# Altium PCB W5500-2_V1.PcbDoc
Units mm, origin at the board's own origin, x right, y up, seen from the top; angles counter-clockwise.
Board outline 100 x 38 mm, 2 copper layers (Top Layer, Bottom Layer), stack 1.536 mm thick; 76 components, 52 nets, 291 pads, 233 vias.
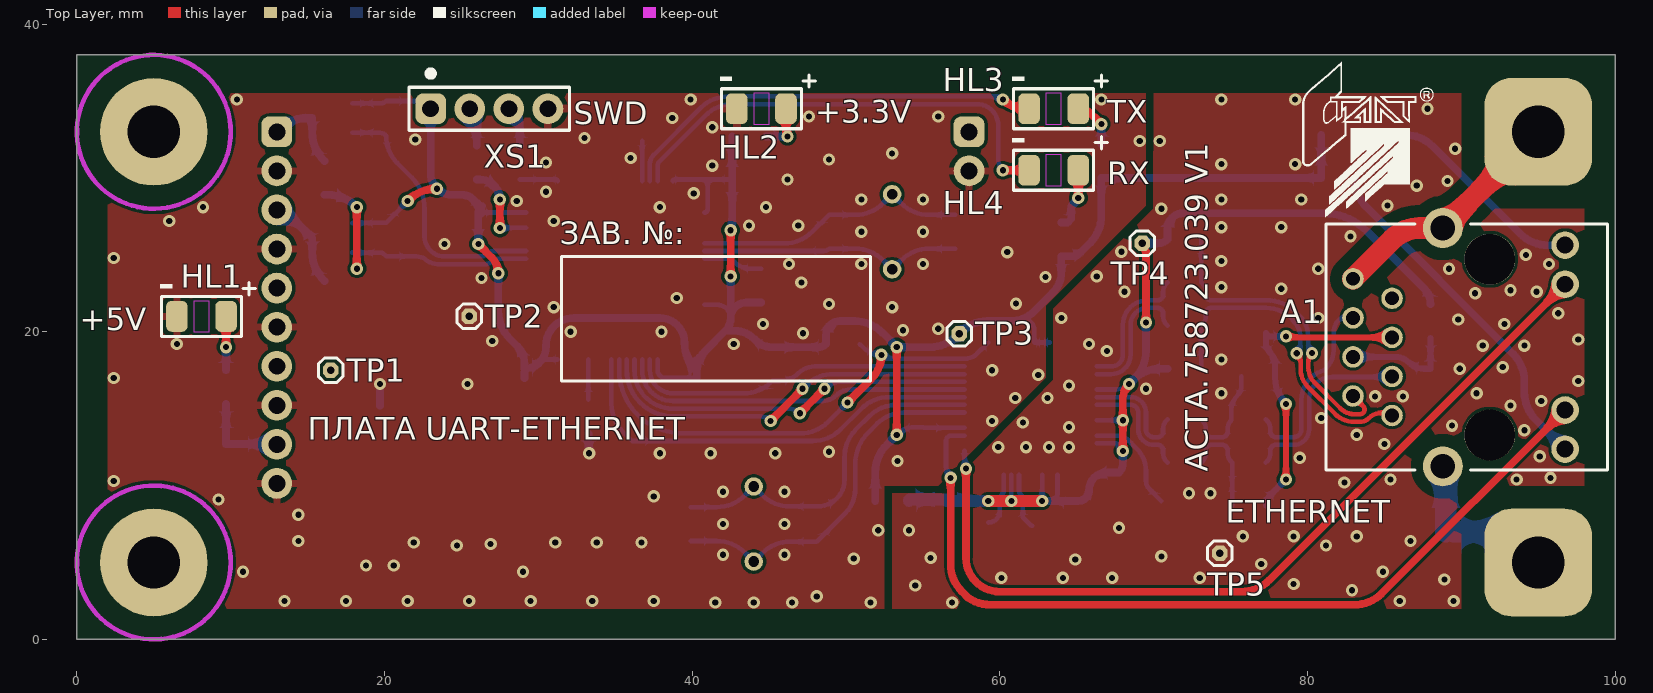
[diagram p0: Top Layer view]
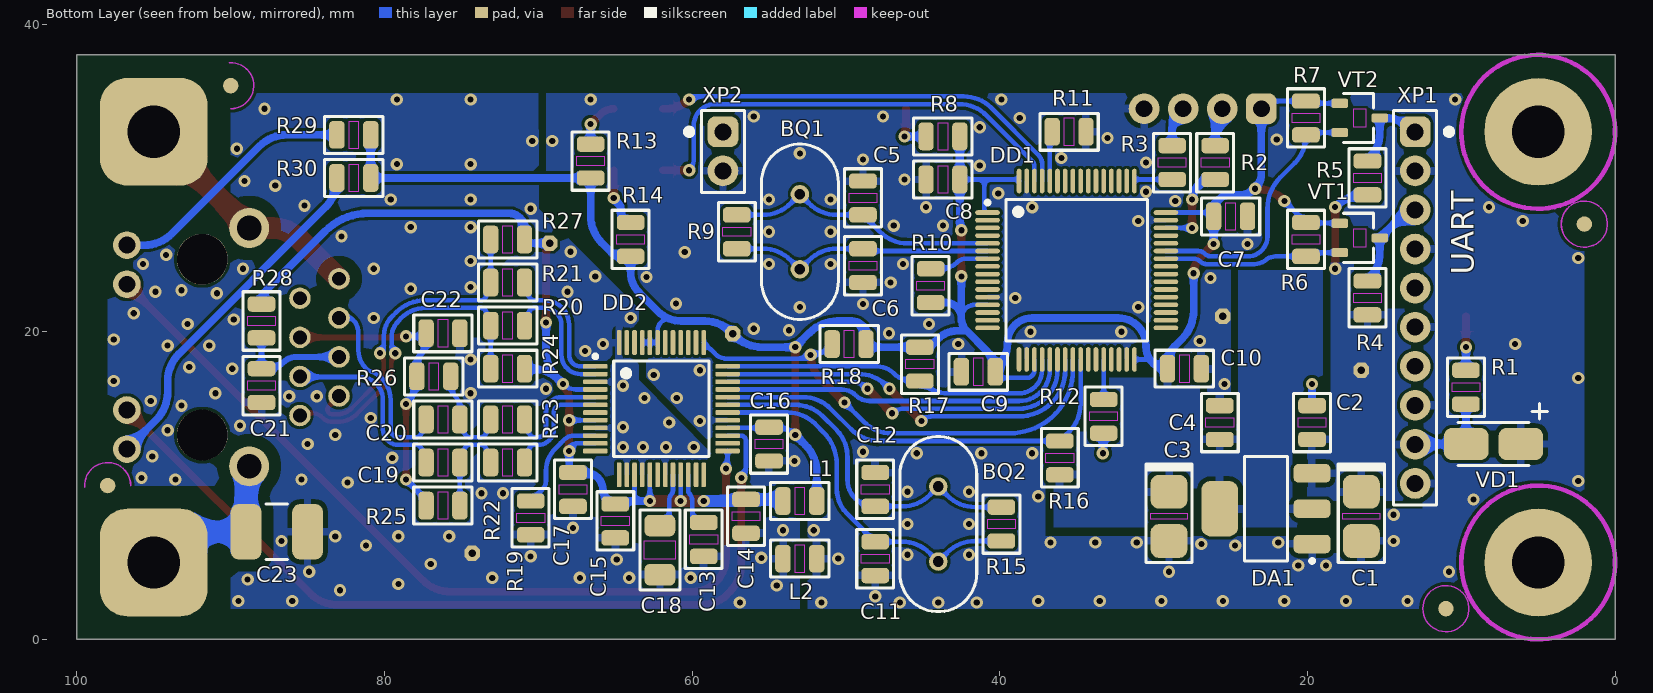
[diagram p1: Bottom Layer view, seen from below]

## Layer stack, top to bottom
Top Solder: solder mask 0.01, Solder Resist, Dk 3.5
Top Layer: signal copper 0.018
Dielectric 1: core 1.5, FR4 Tg135, Dk 4.5
Bottom Layer: signal copper 0.018
Bottom Solder: solder mask 0.01, Solder Resist, Dk 3.5

## Board outline
0,0 0,38 100,38 100,0

## Design rules (kind name [scope] priority, off if disabled: settings)
Clearance Clearance_1 [InNet('EARTH')] p1: gap=0.8 ignorepadtopadclearanceinfootprint=FALSE except(0.7: Arc-THPad Arc-Hole Track-THPad Track-Hole SMDPad-THPad SMDPad-Hole THPad-THPad THPad-Hole Via-Hole Fill-Hole Poly-Hole Region-Hole Text-Hole)
Clearance [All] p2: gap=0.2 ignorepadtopadclearanceinfootprint=FALSE
ComponentClearance [All] p1: gap=0.1 collisioncheckmode=3 verticalgap=0.1 showdistances=FALSE
DiffPairsRouting [All] p1: maxlimit=1 minlimit=0.2 mostfreqgap=0.2 toplayer_minwidth=0.2 toplayer_maxwidth=1 toplayer_prefwidth=0.2 bottomlayer_minwidth=0.2 bottomlayer_maxwidth=1 bottomlayer_prefwidth=0.2 maxuncoupledlength=12.7
Height [All] p1: minheight=0 maxheight=50 prefheight=15
HoleSize [All] p1: absolutevalues=TRUE maxlimit=3.4 minlimit=0.4 maxpercent=80.000 minpercent=20.000
HoleToHoleClearance [All] p1: gap=0.3 allowstackedmicrovias=TRUE
MinimumSolderMaskSliver [All] p1: minsoldermaskwidth=0.1
PasteMaskExpansion [All] p1: expansion=0.05
PlaneConnect [All] p1: planeconnectstyle=Relief reliefexpansion=0.3 reliefentries=4 reliefconductorwidth=0.3 reliefairgap=0.2
PolygonConnect PolygonConnect_testpoint [InComponent('TP1') OR InComponent('TP2') OR InComponent('TP3') OR InComponent('TP4') OR InComponent('TP5')] p1: connectstyle=Direct reliefconductorwidth=0.254 reliefentries=4 polygonreliefangle="90 Angle" airgapwidth=0.254
PolygonConnect PolygonConnect_via [isVia] p2: connectstyle=Direct reliefconductorwidth=0.254 reliefentries=4 polygonreliefangle="90 Angle" airgapwidth=0.254
PolygonConnect [All] p3: connectstyle=Relief reliefconductorwidth=0.5 reliefentries=4 polygonreliefangle="90 Angle" airgapwidth=0.3
RoutingCorners [All] p1: cornerstyle=Round minsetback=0.5 maxsetback=2.5
RoutingVias [All] p1: holewidth=0.4 width=0.8 viastyle="Through Hole" minholewidth=0.4 minwidth=0.8 maxholewidth=0.5 maxwidth=1
SilkToSilkClearance [All] p1: silktosilkclearance=0.1
SilkToSolderMaskClearance [IsPad] p1: minsilkscreentomaskgap=0.1 clearancetoexposedcopper=TRUE
SolderMaskExpansion SolderMaskExpansion_via [isVia] p1: expansion=-0.6 istentingtop=FALSE
SolderMaskExpansion [All] p2: expansion=0.1 istentingtop=FALSE
Width [All] p1: maxlimit=5 minlimit=0.2 preferedwidth=0.5
19 further rules are at their usual default settings.

## Classes and differential pairs
net class ETHERNET: RD_N RD_P RDI_N RDI_P RX_N RX_P TD_N TD_P TX_N TX_P
differential pair RD: +RD_P -RD_N
differential pair TX: +TX_P -TX_N
differential pair TD: +TD_P -TD_N
differential pair RX: +RX_P -RX_N
differential pair RDI: +RDI_P -RDI_N

## Components (designator, comment, footprint, x,y, rotation, side; value= is the part's Value field where it differs from the comment)
A1 "HR911105A" HR911105A 85.5,19 r180 top locked
BQ1 "HT-49S_Rated" HT-49S 53,26.5 r270 bottom value=12MHz
BQ2 "HT-49S_Rated" HT-49S 44,7.5 r90 bottom value=25MHz
C1 "CaseB_TantalumCap" CaseB_TantalumCap 16.5,8 r270 bottom value=47uF
C2 "CAP0805_Rated" CAP0805 19.7,14.1 r90 bottom value=1uF
C3 "CaseB_TantalumCap" CaseB_TantalumCap 29,8 r270 bottom value=47uF
C4 "CAP0805_Rated" CAP0805 25.7,14.1 r90 bottom value=1uF
C5 "CAP0805_Rated" CAP0805 48.9,28.7 r270 bottom value=18pF
C6 "CAP0805_Rated" CAP0805 48.9,24.3 r90 bottom value=18pF
C7 "CAP0805_Rated" CAP0805 25,27.5 r180 bottom value=0.1uF
C8 "CAP0805_Rated" CAP0805 43.7,29.9 r0 bottom value=0.1uF
C9 "CAP0805_Rated" CAP0805 41.4,17.4 r0 bottom value=0.1uF
C10 "CAP0805_Rated" CAP0805 28,17.6 r180 bottom value=0.1uF
C11 "CAP0805_Rated" CAP0805 48.1,5.25 r90 bottom value=18pF
C12 "CAP0805_Rated" CAP0805 48.1,9.75 r270 bottom value=18pF
C13 "CAP0805_Rated" CAP0805 59.25,6.5 r270 bottom value=0.01uF
C14 "CAP0805_Rated" CAP0805 56.5,8 r270 bottom value=0.1uF
C15 "CAP0805_Rated" CAP0805 65,7.7 r270 bottom value=0.1uF
C16 "CAP0805_Rated" CAP0805 55,12.7 r270 bottom value=0.1uF
C17 "CAP0805_Rated" CAP0805 67.75,9.75 r270 bottom value=0.1uF
C18 "CAP1206_Rated" CAP1206 62.1,5.8 r270 bottom value=4.7uF
C19 "CAP0805_Rated" CAP0805 76.2,11.5 r0 bottom value=6800pF
C20 "CAP0805_Rated" CAP0805 76.2,14.3 r0 bottom value=6800pF
C21 "CAP0805_Rated" CAP0805 88,16.5 r270 bottom value=0.022uF
C22 "CAP0805_Rated" CAP0805 76.2,19.9 r180 bottom value=0.01uF
C23 "CAP1812_Rated" CAP1812 87,7 r0 bottom value=2200pF
DA1 "AMS1117-3.3" SOT-223 22.7,8.5 r0 bottom
DD1 "STM32F103RB" LQFP-64 35,24 r180 bottom
DD2 "W5500" LQFP-48 62,15 r180 bottom
HL1 "KPTD-3216MGC" "KPTD-3216 Green" 8.1,21 r0 top
HL2 "KPTD-3216MGC" "KPTD-3216 Green" 44.5,34.5 r0 top
HL3 "KPTD-3216MGC" "KPTD-3216 Green" 63.5,34.5 r0 top
HL4 "KPTD-3216SYC" "KPTD-3216 Yellow" 63.5,30.5 r0 top
L1 "BLM21BD121SN1D" IND0805 53,9 r0 bottom value="120 Ohm"
L2 "BLM21BD121SN1D" IND0805 53,5.25 r0 bottom value="120 Ohm"
R1 "RES0805_Rated" RES0805 9.7,16.4 r270 bottom value=3k
R2 "RES0805_Rated" RES0805 26,31 r270 bottom value=33
R3 "RES0805_Rated" RES0805 28.8,31 r270 bottom value=33
R4 "RES0805_Rated" RES0805 16.1,22.2 r270 bottom value=10k
R5 "RES0805_Rated" RES0805 16.1,30 r270 bottom value=10k
R6 "RES0805_Rated" RES0805 20.1,26 r90 bottom value=10k
R7 "RES0805_Rated" RES0805 20.1,33.9 r90 bottom value=10k
R8 "RES0805_Rated" RES0805 43.7,32.7 r180 bottom value=1k
R9 "RES0805_Rated" RES0805 57.1,26.5 r90 bottom value=1M
R10 "RES0805_Rated" RES0805 44.5,23 r90 bottom value=10k
R11 "RES0805_Rated" RES0805 35.5,33 r0 bottom value=10k
R12 "RES0805_Rated" RES0805 33.25,14.5 r90 bottom value=10k
R13 "RES0805_Rated" RES0805 66.6,31.1 r270 bottom value=1k
R14 "RES0805_Rated" RES0805 64,26 r270 bottom value=1k
R15 "RES0805_Rated" RES0805 39.9,7.5 r270 bottom value=1M
R16 "RES0805_Rated" RES0805 36.1,11.8 r270 bottom value=10k
R17 "RES0805_Rated" RES0805 45.2,17.9 r90 bottom value=10k
R18 "RES0805_Rated" RES0805 49.8,19.2 r180 bottom value=10k
R19 "RES0805_Rated" RES0805 70.5,7.9 r90 bottom value="12.4k 1%"
R20 "RES0805_Rated" RES0805 72,20.4 r0 bottom value=33
R21 "RES0805_Rated" RES0805 72,23.2 r0 bottom value=33
R22 "RES0805_Rated" RES0805 72,11.5 r0 bottom value=33
R23 "RES0805_Rated" RES0805 72,14.3 r0 bottom value=33
R24 "RES0805_Rated" RES0805 72,17.6 r180 bottom value="49.9 1%"
R25 "RES0805_Rated" RES0805 76.2,8.7 r180 bottom value="49.9 1%"
R26 "RES0805_Rated" RES0805 76.8,17.1 r0 bottom value="49.9 1%"
R27 "RES0805_Rated" RES0805 72,26 r180 bottom value="49.9 1%"
R28 "RES0805_Rated" RES0805 88,20.7 r90 bottom value="10 1%"
R29 "RES0805_Rated" RES0805 82,32.8 r180 bottom value=1k
R30 "RES0805_Rated" RES0805 82,30 r180 bottom value=1k
TP1 "TestPad" PAD-TH-OCT1x1-0.5 16.5,17.5 r0 top
TP2 "TestPad" PAD-TH-OCT1x1-0.5 25.5,21 r90 top
TP3 "TestPad" PAD-TH-OCT1x1-0.5 57.372,19.872 r90 top
TP4 "TestPad" PAD-TH-OCT1x1-0.5 69.268,25.756 r90 top
TP5 "TestPad" PAD-TH-OCT1x1-0.5 74.3,5.6 r90 top
VD1 "SMAJ5.0A" "SMA (DO-214AC)" 7.9,12.7 r180 bottom
VT1 "BSS138" SOT-23 16.6,26.1 r180 bottom
VT2 "BSS138" SOT-23 16.6,33.9 r180 bottom
XP1 "PLS-10" PLS-10 13,33 r270 bottom
XP2 "PLS-2" PLS-2 58,33 r270 bottom
XS1 "PBS-4" PBS-4 23,34.5 r0 top

## Footprints (in the part's own frame and the unit in brackets; to place one, negate y for a bottom-side part, rotate by r counter-clockwise, add the part's x,y. Pads: shape width x height; smd on the part's side, far side on the other; paste and mask are expansions set on the pad)
CAP0805 [mm] "Chip Capacitor, 2-Leads, Body 2,00x1,25mm, IPC Low Density"
  rrect50% 1x1.8 smd: 1(-1.1,0) 2(1.1,0)
  Top Layer keep-out region: -0.3,0.9 0.3,0.9 0.3,-0.9 -0.3,-0.9
  silkscreen extent -1.9,-1.2 1.9,1.2, body extent -1,-0.62 1,0.63, height 1
CAP1206 [mm] "Chip Capacitor, 2-Leads"
  rrect50% 1.4x2 smd: 1(-1.6,0) 2(1.6,0)
  Top Layer keep-out region: -0.6,1 0.6,1 0.6,-1 -0.6,-1
  silkscreen extent -2.6,-1.3 2.6,1.3, body extent -1.7,-0.9 1.7,0.9, height 1
CAP1812 [mm] "Chip Capacitor, 2-Leads"
  rrect50% 2x3.6 smd: 1(-2,0) 2(2,0)
  silkscreen extent -0.7,-1.8 0.7,1.8, body extent -2.25,-1.6 2.25,1.6, height 1
CaseB_TantalumCap [mm]
  rrect50% 2.2x2.4 smd: 1(-1.6,0) 2(1.6,0)
  Top Layer keep-out region: -0.2,1.2 0.2,1.2 0.2,-1.2 -0.2,-1.2
  silkscreen extent -3.4,-1.5 3,1.5, body extent -1.75,-1.4 1.75,1.4, height 1.9
HR911105A [mm] "Ethernet Connector 10/100 1x1 Tab Down RJ45 w/mag G/Y LED"
  round 3.3 hole 3.3: 0(-6.35,5.715) 0(-6.35,-5.715)
  round 2.6 hole 1.6: 0(-3.3,7.745) 0(-3.3,-7.745)
  round 1.4 hole 0.9: 1(0,4.445) 2(2.54,3.175) 3(0,1.905) 4(2.54,0.635) 5(0,-0.635) 6(2.54,-1.905) 7(0,-3.175) 8(2.54,-4.445)
  round 1.8 hole 1.1: 9(-11.25,6.63) 10(-11.25,4.09) 11(-11.25,-4.09) 12(-11.25,-6.63)
  silkscreen extent -14,-8 4.3,8, body extent -17.27,-7.94 4.13,7.94, height 13.7
HT-49S [mm] "TH Crystal"
  round 1.2 hole 0.7: 1(-2.44,0) 2(2.44,0)
  silkscreen extent -5.7,-2.5 5.7,2.5, body extent -5.48,-2.25 5.5,2.25, height 3.7
IND0805 [mm] "Chip Inductor, 2-Leads, Body 2,00x1,25mm, IPC Low Density"
  rrect50% 1x1.8 smd: 1(-1.1,0) 2(1.1,0)
  Top Layer keep-out region: -0.3,0.9 0.3,0.9 0.3,-0.9 -0.3,-0.9
  silkscreen extent -1.9,-1.2 1.9,1.2, body extent -1,-0.62 1,0.63, height 0.85
"KPTD-3216 Green" [mm] "3.2x1.6mm SMD LED Green"
  rrect50% 1.4x2 smd: A(1.6,0) K(-1.6,0)
  Top Layer keep-out region: -0.5,-1 0.5,-1 0.5,1 -0.5,1
  silkscreen extent -2.7,-1.3 3.5,2.2, body extent -1.6,-0.8 1.6,0.8, height 1.8
"KPTD-3216 Yellow" [mm] "3.2x1.6mm SMD LED Yellow"
  rrect50% 1.4x2 smd: A(1.6,0) K(-1.6,0)
  Top Layer keep-out region: -0.5,-1 0.5,-1 0.5,1 -0.5,1
  silkscreen extent -2.7,-1.3 3.5,2.2, body extent -1.6,-0.8 1.6,0.8, height 1.8
LQFP-48 [mm] "LQFP, 48-Leads, Body 7,00x7,00mm, Pitch 0,50mm, IPC Low Density"
  rrect50% 1.6x0.3 smd: 1(-4.3,2.75) 2(-4.3,2.25) 3(-4.3,1.75) 4(-4.3,1.25) 5(-4.3,0.75) 6(-4.3,0.25) 7(-4.3,-0.25) 8(-4.3,-0.75) 9(-4.3,-1.25) 10(-4.3,-1.75) 11(-4.3,-2.25) 12(-4.3,-2.75) 25(4.3,-2.75) 26(4.3,-2.25) 27(4.3,-1.75) 28(4.3,-1.25) 29(4.3,-0.75) 30(4.3,-0.25) 31(4.3,0.25) 32(4.3,0.75) 33(4.3,1.25) 34(4.3,1.75) 35(4.3,2.25) 36(4.3,2.75)
  rrect50% 0.3x1.6 smd: 13(-2.75,-4.3) 14(-2.25,-4.3) 15(-1.75,-4.3) 16(-1.25,-4.3) 17(-0.75,-4.3) 18(-0.25,-4.3) 19(0.25,-4.3) 20(0.75,-4.3) 21(1.25,-4.3) 22(1.75,-4.3) 23(2.25,-4.3) 24(2.75,-4.3) 37(2.75,4.3) 38(2.25,4.3) 39(1.75,4.3) 40(1.25,4.3) 41(0.75,4.3) 42(0.25,4.3) 43(-0.25,4.3) 44(-0.75,4.3) 45(-1.25,4.3) 46(-1.75,4.3) 47(-2.25,4.3) 48(-2.75,4.3)
  silkscreen extent -4.43,-3.1 3.1,3.52, body extent -4.57,-4.57 4.57,4.57, height 1.62
LQFP-64 [mm] "LQFP, 64-Leads, Body 10,00x10,00mm, Pitch 0,50mm, IPC Low Density"
  oval 1.6x0.3 smd: 1(-5.8,3.75) 2(-5.8,3.25) 3(-5.8,2.75) 4(-5.8,2.25) 5(-5.8,1.75) 6(-5.8,1.25) 7(-5.8,0.75) 8(-5.8,0.25) 9(-5.8,-0.25) 10(-5.8,-0.75) 11(-5.8,-1.25) 12(-5.8,-1.75) 13(-5.8,-2.25) 14(-5.8,-2.75) 15(-5.8,-3.25) 16(-5.8,-3.75) 33(5.8,-3.75) 34(5.8,-3.25) 35(5.8,-2.75) 36(5.8,-2.25) 37(5.8,-1.75) 38(5.8,-1.25) 39(5.8,-0.75) 40(5.8,-0.25) 41(5.8,0.25) 42(5.8,0.75) 43(5.8,1.25) 44(5.8,1.75) 45(5.8,2.25) 46(5.8,2.75) 47(5.8,3.25) 48(5.8,3.75)
  oval 0.3x1.6 smd: 17(-3.75,-5.8) 18(-3.25,-5.8) 19(-2.75,-5.8) 20(-2.25,-5.8) 21(-1.75,-5.8) 22(-1.25,-5.8) 23(-0.75,-5.8) 24(-0.25,-5.8) 25(0.25,-5.8) 26(0.75,-5.8) 27(1.25,-5.8) 28(1.75,-5.8) 29(2.25,-5.8) 30(2.75,-5.8) 31(3.25,-5.8) 32(3.75,-5.8) 49(3.75,5.8) 50(3.25,5.8) 51(2.75,5.8) 52(2.25,5.8) 53(1.75,5.8) 54(1.25,5.8) 55(0.75,5.8) 56(0.25,5.8) 57(-0.25,5.8) 58(-0.75,5.8) 59(-1.25,5.8) 60(-1.75,5.8) 61(-2.25,5.8) 62(-2.75,5.8) 63(-3.25,5.8) 64(-3.75,5.8)
  silkscreen extent -5.93,-4.6 4.6,4.6, body extent -6.07,-6.07 6.07,6.07, height 1.62
PAD-TH-OCT1x1-0.5 [mm] "PAD TH 1x1mm Octogonal Hole 0.5mm"
  oct 1x1 hole 0.5: 1(0,0)
  silkscreen extent -0.8,-0.8 0.8,0.8
PBS-4 [mm] "Female Header Pitch 2.54mm"
  rrect50% 2x2 hole 1.1: 1(0,0)
  round 2 hole 1.1: 2(2.54,0) 3(5.08,0) 4(7.62,0)
  silkscreen extent -1.4,-1.4 9.02,2.49, body extent -1.27,-1.27 8.89,1.27, height 8.4
PLS-2 [mm] "Pin Header Pitch 2.54mm"
  rrect50% 2x2 hole 1.1: 1(0,0)
  round 2 hole 1.1: 2(2.54,0)
  silkscreen extent -1.4,-2.4 3.94,1.4, body extent -1.27,-1.27 3.81,1.27, height 8.44
PLS-10 [mm] "Pin Header Pitch 2.54mm"
  rrect50% 2x2 hole 1.1: 1(0,0)
  round 2 hole 1.1: 2(2.54,0) 3(5.08,0) 4(7.62,0) 5(10.16,0) 6(12.7,0) 7(15.24,0) 8(17.78,0) 9(20.32,0) 10(22.86,0)
  silkscreen extent -1.4,-1.4 24.26,2.4, body extent -1.27,-1.27 24.13,1.27, height 8.44
RES0805 [mm] "Chip Resistor, 2-Leads, Body 2,00x1,25mm, IPC Low Density"
  rrect50% 1x1.8 smd: 1(-1.1,0) 2(1.1,0)
  Top Layer keep-out region: -0.3,0.9 0.3,0.9 0.3,-0.9 -0.3,-0.9
  silkscreen extent -1.9,-1.2 1.9,1.2, body extent -1,-0.62 1,0.63, height 0.47
"SMA (DO-214AC)" [mm] "Molded Diode, 2-Leads, Body 4,30x2,40mm, IPC Low Density"
  rrect50% 2.9x2.1 smd: A(1.778,0) K(-1.778,0)
  silkscreen extent -2.3,-1.4 3.5,2.63, body extent -2.79,-1.47 2.81,1.48, height 2.9
SOT-23 [mm] "3-Leads, Body 2,90x2,45mm, Pitch 0,95mm, IPC Low Density"
  rrect50% 1.1x0.6 smd: 1(-1.3,0.95) 2(-1.3,-0.95) 3(1.3,0)
  Top Layer keep-out region: -0.4,0.6 0.4,0.6 0.4,-0.6 -0.4,-0.6
  silkscreen extent -1.05,-1.6 0.9,1.6, body extent -1.3,-1.48 1.3,1.52, height 1.1
SOT-223 [mm] "SOT223, 4-Leads, Body 6,50x7,00mm (avg), Pitch 2,30mm, IPC Low Density"
  rrect50% 2.4x1.2 smd: 1(-3,2.3) 2(-3,0) 3(-3,-2.3)
  rrect50% 2.4x3.6 smd: 2(3,0)
  silkscreen extent -3.12,-3.4 1.4,3.52, body extent -3.48,-3.25 3.48,3.25, height 1.7

## Part data
A1: "Ethernet Connector 10/100 1x1 Tab Down RJ45 w/mag G/Y LED"
C1 C3: Voltage=10V
C2 C4 C5 C6 C7 C8 C9 C10 C11 C12 C13 C14 C15 C16 C17 C19 C20 C21 C22: Case=0805, ComponentLink1Description=DatasheetLink
C18: Case=1206, ComponentLink1Description=DatasheetLink
C23: Case=1812, ComponentLink1Description=DatasheetLink
DA1: "Fixed Voltage 3.3V 1A Low Dropout Voltage Regulator"
DD1: "ARM Cortex-M3 MCU"
DD2: "Ethernet ICs 3in1 Enet Controller TCP/IP +MAC+PHY"
HL1 HL2 HL3: "3.2x1.6mm SMD LED Mega Green"
HL4: "3.2x1.6mm SMD LED Super Bright Yellow"
L1 L2: "Ferrite Bead 0805 120 Ohm", Case=0805, DCResistance="0.25 Ohm", Manufacturer=Murata, RatedCurrent=200mA, Tolerance=25%, 1Carticle=42076, 1Ccode=М00053470, 1CfullName="BLM21BD121SN1D MUR", 1Cgroup=01010901, 1Cname="BLM21BD121SN1D MUR", ComponentLink1Description=DatasheetLink, Name="Фильтр BLM21BD121SN1D", PartNumber=BLM21BD121SN1D
R1 R2 R3 R4 R5 R6 R7 R8 R9 R10 R11 R12 R13 R14 R15 R16 R17 R18 R19 R20 R21 R22 R23 R24 R25 R26 R27 R28 R29 R30: Tolerance=5%
TP1 TP2 TP3 TP4 TP5: "TestPoint on PCB", Label="\"Label\""
VD1: "5Vr 400W 43.5A UniDirectional TVS", Vbr=6.4V
VT1 VT2: "Small Signal N-Channel MOSFET 50V 220mA", Case=SOT-23, 1Carticle=30894, 1Ccode=М00041810, 1CfullName="Транзистор BSS138", 1Cgroup=01010104, 1Cname="Транзистор BSS138", ChannelPolarity=N-Channel, ComponentLink1Description=DatasheetLink, Name="Транзистор BSS138", PartNumber=BSS138
XP1 XP2: "Pin Header Pitch 2.54mm", Circuit2=GND, Label="\"Label\""
  XP1: Circuit1=TX, Circuit3=RX, Circuit4=GND, Circuit5=NC, Circuit6=GND, Circuit7=NC, Circuit8=GND, Circuit9=+5V, Circuit10=GND
  XP2: Circuit1=NC
XS1: "Female Header Pitch 2.54mm", Circuit1=+3.3V, Circuit2=SWDIO, Circuit3=SWCLK, Circuit4=GND, ComponentLink1Description=DatasheetLink, Label="\"SWD\""
BQ1 BQ2: ComponentLink1Description=DatasheetLink

## Free pads (board coordinates)
  round 1 smd far side mask+1: 0(2,27) 0(11,2) 0(90,36) 0(98,10)
  round 7 hole 3.4: 0(5,5) 0(5,33)
  rrect50% 7x7 hole 3.4: 0(95,5) 0(95,33)

## Via types
v1: diameter 0.8, hole 0.4, Top Layer to Bottom Layer, 233 vias

## Nets (pads, with @x,y where several pads share a name; then routed paths per layer and width w, separated by ;. In a path a pad name is that pad's centre, name@x,y a point inside that pad or via, vN(x,y) a via of type N, cw(c..) or ccw(c..) an arc to the next point about the centre after c; other vN are vias at no path point)
1.2V: C13.1 DD2.22 | length 3.6
  Bottom Layer w0.3: C13.1 ccw(c59.25,8.35) 60,8.35 60,9 cw(c60.75,9) 60.22,9.53 ccw(c59.95,9.662) 60.25,9.661 DD2.22
3.3V: C3.1 C4.1 C7.1 C8.1 C9.1 C10.1 C16.1 DA1.2 DD1.1 DD1.13 DD1.19 DD1.32 DD1.48 DD1.64 DD2.28 DD2.43 DD2.44 DD2.45 L1.1 R6.2 R7.2 R8.2 R10.1 R13.2 R14.2 R16.2 R17.2 R18.2 R29.2 R30.2 TP3.1 VT1.1 VT2.1 XS1.1 | length 151.1
  Top Layer w0.5: v1(21.5,28.5) 21.556,28.556 cw(c23.352,26.76) 23.352,29.3 v1(23.4,29.3) ; v1(26.1,25.7) 26.976,24.824 cw(c25.951,23.8) 27.387,23.995 cw(c25.951,23.8) v1(27.4,23.8) ; v1(42.5,23.6) v1(42.5,26.6) ; v1(53.3,13.3) v1(53.3,19)
  Bottom Layer w0.3: VT1.1 17.925,27.075 20.075,27.075 R6.2 v1(21.5,28.5) ; VT2.1 19.738,34.85 ccw(c19.738,35.362) R7.2 21.793,35 cw(c21.793,33.293) XS1.1 ; C7.1@26.35,27.75 DD1.48 ; 30.3,18.2 DD1.32 ; DD1.19 37.75,17.5 ccw(c38.25,17.5) 37.88,17.164 37.914,17.13 ccw(c38.25,17.5) 38.25,17 C9.1@40,17 ; DD1.64 cw(c38.85,29.8) 38.85,29.9 41,29.9 ; DD1.13 41.628,21.75 cw(c41.628,20.878) 42.5,20.878 ; DD1.1 ccw(c40.8,27.95) 41,27.95 41,29.9 ; C8.1@42.6,29.8 ccw(c42.5,29.8) 42.5,29.9 41,29.9 ; v1(53.3,13.3) cw(c54.507,12.093) 54.507,13.8 C16.1 ccw(c55.121,13.921) 55.121,13.75 DD2.28 ; 61.482,20.846 cw(c61.482,20.078) 62.25,20.078 DD2.43 DD2.44 DD2.45
  Bottom Layer w0.5: XS1.1 23,30.266 ccw(c24.366,30.266) v1(23.4,29.3) ccw(c24.366,30.266) 24.366,28.9 25,28.9 cw(c25,27.8) 25.298,28.859 ccw(c25.431,29.341) 25.36,28.846 cw(c25.3,28.4) 25.62,28.716 ccw(c25.974,29.069) 25.669,28.673 cw(c25,27.8) 26.041,28.154 ccw(c26.467,28.302) 26.043,28.15 26.35,28.15 26.1,27.8 C7.1 ; v1(26.1,25.7) C7.1 ; C7.1@26.35,27.75 C7.1 ; v1(27.4,23.8) 27.4,21.352 ccw(c29.94,21.352) 28.144,19.556 28.6,19.1 cw(c27.393,17.893) 29.1,17.893 C10.1 ccw(c29.1,19) 30.5,19 ; C10.1@29.1,17 C10.1@29.1,17.348 ; 30.5,19.1 cw(c32.3,19.1) 32.3,20.9 37.9,20.9 cw(c37.9,19.3) 39.5,19.3 39.5,19.252 ccw(c42.04,19.252) 40.244,17.456 C9.1 ; C9.1@40.3,17.007 C9.1 ; v1(42.5,23.6) 42.5,22.626 42.5,20.878 ; v1(42.5,26.6) 42.5,26.681 42.6,26.781 C8.1@42.6,29.8 ; C8.1 R8.2 ; R10.1 43.522,21.9 ccw(c43.522,20.878) 42.5,20.878 ; L1.1 51.9,10.848 cw(c54.44,10.848) 52.644,12.644 v1(53.3,13.3) ; R29.2 R30.2 R13.2 66.6,27.552 cw(c64.06,27.552) 65.856,25.756 65.3,25.2 cw(c64.576,25.924) 64.576,24.9 R14.2 64,23.878 cw(c62.122,23.878) 63.45,22.55 62.236,21.336 cw(c60.7,22.873) 61.482,20.846 cw(c60.7,22.873) 60.7,20.7 59.19,20.7 ccw(c59.19,18.31) 57.5,20 TP3.1 57.244,19.744 cw(c55.448,21.54) 55.448,19 v1(53.3,19) 52.344,19.956 ccw(c50.548,18.16) 50.548,20.7 49.624,20.7 ccw(c49.624,19.776) 48.7,19.776 R18.2 cw(c48.217,19.683) 48.217,19 R17.2 cw(c45.2,20.69) 44.326,19.243 44.039,19.531 ccw(c42.756,18.248) 43.707,19.793 ccw(c42.756,18.248) 42.756,20.062 42.162,20.062 ; C9.1 cw(c42.231,17.4) 40.866,18.766 42.162,20.062 ; 42.162,20.062 ccw(c41.346,20.878) 42.5,20.878
3.3VA: C14.1 C15.1 C17.1 DD2.4 DD2.8 DD2.11 DD2.15 DD2.17 DD2.21 L1.2 R24.2 R27.2 R28.2 TP4.1 | length 66.5
  Top Layer w0.5: v1(68,12.25) v1(68,14.25) 68,15.634 cw(c69.366,15.634) v1(68.4,16.6) ; TP4.1 69.415,25.61 69.415,25.299 69.5,25.213 v1(69.5,20.6)
  Top Layer w0.8: v1(59.25,9) v1(60.75,9) v1(62.75,9)
  Bottom Layer w0.3: v1(60.75,9) DD2.21 ; v1(62.75,9) DD2.17 ; 63.3,9 ccw(c63.3,9.45) 63.75,9.45 DD2.15 ; DD2.11 67.5,12.75 cw(c67.5,12.25) v1(68,12.25) ; DD2.8 v1(68,14.25) ; DD2.4 67.555,16.25 ccw(c67.555,17.445) 68.001,16.336 ccw(c67.555,17.445) v1(68.4,16.6)
  Bottom Layer w0.5: v1(62.75,9) 63.3,9 65.1,9 ccw(c65.1,9.7) 65.8,9.7 cw(c66.95,9.7) 66.95,10.85 C17.1 ccw(c67.146,11.454) 68,11.454 v1(68,12.25) ; v1(68.4,16.6) 68.656,16.856 cw(c70.452,15.06) 70.452,17.6 R24.2 ; 68.756,16.956 ccw(c66.96,18.752) 69.5,18.752 v1(69.5,20.6) ; TP4.1 70.312,25.756 ccw(c70.312,26.588) R27.2 70.9,26.7 cw(c71.9,26.7) 71.9,27.7 81.048,27.7 cw(c81.048,23.711) 83.868,26.532 87.576,22.824 ; 87.576,22.824 cw(c86.551,21.8) 87.643,22.752 cw(c86.551,21.8) R28.2
  Bottom Layer w0.8: L1.2 cw(c54.2,9) 54.2,9.1 C14.1 ccw(c56.6,9.1) 56.6,9 v1(59.25,9)
5V: C1.1 C2.1 DA1.3 R1.2 R4.2 R5.2 TP1.1 VD1.K XP1.9 | length 12.3
  Top Layer w0.5: v1(18.2,24.1) v1(18.2,28.1)
  Bottom Layer w0.5: R1.2 9.7,12.753 cw(c9.625,12.753) VD1.K XP1.9@12.952,12.7 ; R5.2 16.348,28.9 cw(c16.348,26.36) 18.144,28.156 v1(18.2,28.1)
  Bottom Layer w1: XP1.9@12.952,12.7 cw(c12.952,12.632) XP1.9
ACTLED: A1.10 DD2.27 | length 56.1
  Top Layer w0.5: v1(56.8,10.5) 56.8,4.899 ccw(c59.34,4.899) 57.544,3.103 57.92,2.727 ccw(c59.402,4.79) 59.402,2.25 83.038,2.25 ccw(c83.038,4.79) 84.834,2.994 A1.10
  Bottom Layer w0.3: v1(56.8,10.5) cw(c57.524,11.224) 56.5,11.224 56.5,12.9 cw(c56.85,12.9) 56.85,13.25 DD2.27
BOOT0: DD1.60 R11.2 | length 2.6
  Bottom Layer w0.3: DD1.60 R11.2@36.75,32.4
BOOT1: DD1.28 R12.2 | length 2.6
  Bottom Layer w0.3: R12.2 DD1.28
EARTH: A1.0@88.8,11.255 A1.0@88.8,26.745 A1.8 C23.2 pad.0@95,5 pad.0@95,33 | length 26.4
  Top Layer w1.4: A1.8 85.516,26.001 cw(c87.312,24.205) 87.312,26.745 88.8,26.745 94.961,32.906 ccw(c94.867,33) pad.0@95,33
  Bottom Layer w1.4: A1.0@88.8,11.255 cw(c88.317,10.772) 89,10.772 C23.2 ; C23.2@89.5,7 91.948,7 cw(c91.948,4.46) 93.744,6.256 pad.0@95,5
EXRES: DD2.10 R19.2 | length 6.9
  Bottom Layer w0.3: DD2.10 67.7,13.25 cw(c67.7,12.405) 68.297,13.003 68.437,12.863 ccw(c68.648,13.076) 68.462,12.841 cw(c68,12.25) 68.591,12.712 ccw(c68.826,12.898) 68.613,12.687 68.9,12.4 cw(c67.451,10.951) 69.5,10.951 69.5,10.3 ccw(c70.224,10.3) 69.712,9.788 R19.2
GND: C1.2 C2.2 C3.2 C4.2 C5.1 C6.1 C7.2 C8.2 C9.2 C10.2 C11.1 C12.1 C16.2 DA1.1 DD1.12 DD1.18 DD1.31 DD1.47 DD1.63 DD2.29 HL1.K HL2.K L2.1 R11.1 R12.1 TP2.1 VD1.A XP1.2 XP1.4 XP1.6 XP1.8 XP1.10 XP2.2 XS1.4 | length 2.7
  Bottom Layer w0.5: C2.2 v1(19.7,16.6) ; R12.1 33.275,13.375 33.275,12.125 v1(33.3,12.1)
  other v1: 41.5,2.4 44,2.4 46.5,2.4 51.6,2.4 13.5,2.5 17.5,2.5 21.5,2.5 25.5,2.5 29.5,2.5 33.5,2.5 37.5,2.5 48.1,2.8 10.8,4.4 29,4.4 18.8,4.8 20.6,4.8 50.5,5.25 42,5.5 46,5.5 24.7,6.1 26.9,6.2 21.9,6.3 31.1,6.3 33.8,6.3 36.7,6.3 14.4,6.4 52.1,7.1 42,7.5 46,7.5 14.4,8.1 9.2,9.1 37.5,9.3 42,9.6 46,9.6 2.4,10.3 53.35,11.6 37.9,12.1 41.2,12.1 45.4,12.1 48.9,12.2 59.5,14.2 61,15.7 25.4,16.6 2.4,17 62.5,17.2 59.5,17.5 6.5,19.2 42.7,19.2 27,19.4 47.2,19.9 32.1,20 38,20 53.7,20.1 56,20.2 44.6,20.5 31,21.6 53,21.6 48.9,21.8 61.048,21.828 39,22.2 47.1,23.2 26.3,23.5 62.972,23.559 46.3,24.4 51,24.4 55,24.4 2.4,24.8 60.486,25.176 23.9,25.7 51,26.5 55,26.5 43.7,26.9 46.9,26.9 6,27.2 31,27.2 8.2,28.1 37.9,28.1 44.8,28.1 28.6,28.5 51,28.6 55,28.6 40.1,29 30.5,29.1 46.2,29.9 41.3,30.8 30.5,31 48.9,31.2 36,31.3 53,31.6 69.1,32.4 22,32.5 33,32.6 41.3,33.3 38.7,33.9 47.6,34 56,34 10.4,35.1 39.9,35.1 66.6,35.1
GNDA: C13.2 C14.2 C15.2 C17.2 C18.2 C21.2 C22.2 C23.1 DD2.3 DD2.9 DD2.14 DD2.16 DD2.19 DD2.48 L2.2 R19.1 TP5.1
  other v1: 56.9,2.4 86,2.5 89.5,2.5 82.9,3.2 54.5,3.5 79.1,3.6 88.9,3.9 60.1,4 64.1,4 67.3,4 73,4 84.9,4.4 77,4.9 64.9,5.2 55.5,5.3 70.5,5.4 81.2,6.1 86.7,6.4 75.8,6.7 79.1,6.7 83.2,6.7 54.1,7.1 67.75,7.25 72.3,9.5 73.7,9.5 82.4,10.2 85.4,10.4 93.6,10.4 95.8,10.5 79.5,11.8 95.1,11.9 59.9,12.5 61.7,12.5 63.2,12.5 64.5,12.5 85,12.7 83.2,13.3 94.1,13.6 64.5,13.8 89.4,13.9 61.5,14.1 80.9,14.4 93.2,15.2 95.2,15.5 63.1,15.7 84.4,15.8 86.2,15.8 74.4,16 91,16 69.5,16.3 64.5,16.5 97.6,16.8 89.9,17.6 92.7,17.7 74.4,18.2 66.96,18.752 91.4,19.1 94.1,19.1 65.8,19.2 97.6,19.5 92.8,20.5 89.8,20.8 64,20.9 80.7,20.9 96.3,21.2 90.9,22.5 68.1,22.6 94.9,22.6 93.2,22.7 78.3,22.8 74.4,22.9 66.3,23.6 80.7,24.1 89.2,24.1 95.7,24.4 74.4,24.6 94.2,25 67.9,25.2 82.8,26.2 74.4,26.8 78.3,26.8 70.5,28 85.2,28.2 74.4,28.6 79.6,28.6 87.1,29.5 89.1,29.8 74.4,30.9 79.2,30.9 89.6,31.9 70.4,32.4 87.8,34.5 74.4,35.1 79.2,35.1
LED-RX: DD1.62 HL4.K | length 30.2
  Top Layer w0.5: v1(60.2,30.5) HL4.K
  Bottom Layer w0.3: DD1.62 37.75,30.75 cw(c38.233,30.75) 37.891,31.091 40.856,34.056 cw(c42.652,32.26) 42.652,34.8 58.5,34.8 cw(c58.5,33.4) 59.9,33.4 59.9,31.224 ccw(c60.924,31.224) 59.968,30.858 ccw(c60.924,31.224) v1(60.2,30.5)
LED-TX: DD1.61 HL3.K | length 27.9
  Top Layer w0.5: v1(60.2,35.1) ccw(c61.649,36.549) 61.649,34.5 HL3.K
  Bottom Layer w0.3: DD1.61 37.25,30.913 cw(c38.063,30.913) 37.488,31.488 40.556,34.556 cw(c42.352,32.76) 42.352,35.3 59.865,35.3 60.065,35.1 v1(60.2,35.1)
LINKLED: A1.11 DD2.25 | length 55.4
  Top Layer w0.5: v1(57.8,11.1) 57.8,5.3 ccw(c60,5.3) 60,3.1 75.708,3.1 ccw(c75.708,5.64) 77.504,3.844 A1.11
  Bottom Layer w0.3: DD2.25 57.7,11.341 ccw(c58.041,11.341) v1(57.8,11.1)
NetA1_9: A1.9 R30.1 | length 23
  Bottom Layer w0.5: R30.1 83.1,29.886 ccw(c85.64,29.886) 83.844,28.09 93.356,18.578 cw(c91.56,16.781) 94.1,16.781 94.1,16.072 ccw(c96.64,16.072) 94.844,14.276 A1.9
NetA1_12: A1.12 R29.1 | length 16.4
  Bottom Layer w0.5: R29.1 86.348,32.8 cw(c86.348,30.26) 88.144,32.056 93.826,26.374 ccw(c95.622,28.17) 95.622,25.63 A1.12
NetC18_1: C18.1 DD2.20 | length 3.7
  Bottom Layer w0.3: DD2.20 61.25,9.75 61.25,9.662 ccw(c61.55,9.662) 61.28,9.53 cw(c60.75,9) 61.5,9 61.5,7.935 62.035,7.4 C18.1
NetHL1_A: HL1.A R1.1 | length 3.5
  Top Layer w0.5: v1(9.7,19) HL1.A
  Bottom Layer w0.5: R1.1 v1(9.7,19)
NetHL2_A: HL2.A R8.1 | length 3.2
  Top Layer w0.5: HL2.A 46.1,32.941 ccw(c46.441,32.941) v1(46.2,32.7)
  Bottom Layer w0.5: R8.1 v1(46.2,32.7)
NetHL3_A: HL3.A R13.1 | length 3.2
  Top Layer w0.5: HL3.A cw(c65.1,33.293) 65.954,34.146 v1(66.6,33.5)
  Bottom Layer w0.5: R13.1 v1(66.6,33.5)
NetHL4_A: HL4.A R14.1 | length 4.1
  Top Layer w0.5: v1(65.1,28.7) HL4.A
  Bottom Layer w0.5: R14.1 64.4,27.1 64.65,27.35 64.65,28.169 65.1,28.619 v1(65.1,28.7)
NetR2_1: R2.1 XS1.2 | length 2.7
  Bottom Layer w0.5: XS1.2 cw(c25.54,34.04) 26,34.04 R2.1
NetR3_1: R3.1 XS1.3 | length 2.7
  Bottom Layer w0.5: XS1.3 28.08,34.213 28.08,34.113 28.118,34.021 ccw(c28.58,34.213) 28.373,33.758 cw(c28.08,33.1) 28.8,33.1 R3.1
NRST: DD1.7 R10.2 | length 3.9
  Bottom Layer w0.3: DD1.7 42.196,24.75 cw(c42.196,23.896) 42.8,24.5 ccw(c43.766,25.466) 43.766,24.1 R10.2
OSCIN: BQ1.1 C5.2 DD1.5 R9.2 | length 17.8
  Bottom Layer w0.3: DD1.5 45.998,25.75 ccw(c45.998,28.29) 47.794,26.494 C5.2 50.608,27.6 ccw(c50.608,30.14) 52.404,28.344 BQ1.1 53.596,28.344 ccw(c55.392,30.14) 55.392,27.6 R9.2
OSCOUT: BQ1.2 C6.2 DD1.6 R9.1 | length 17.2
  Bottom Layer w0.3: DD1.6 48.538,25.25 ccw(c48.538,25.762) C6.2 50.608,25.4 cw(c50.608,22.86) 52.404,24.656 BQ1.2 53.596,24.656 cw(c55.392,22.86) 55.392,25.4 R9.1
RCT: A1.5 C22.1 R25.1 R26.2 | length 20.7
  Top Layer w0.4: v1(78.6,10.4) v1(78.6,15.3) ; v1(78.6,19.7) cw(c78.529,19.306) 78.757,19.635 A1.5
  Bottom Layer w0.4: R25.1@77.3,9.1 R25.1 cw(c78.266,8.7) 77.583,9.383 v1(78.6,10.4) ; v1(78.6,15.3) cw(c80.29,16.99) 77.9,16.99 R26.2 77.9,17.876 ccw(c76.876,17.876) 77.6,18.6 cw(c78.324,19.324) 77.3,19.324 C22.1 77.5,19.7 v1(78.6,19.7)
RD_N: C20.1 R23.2 R26.1 | length 6.5
  Bottom Layer w0.3: R23.2 73.155,14.245 cw(c72.593,13.682) 73.388,13.682 73.388,13.497 ccw(c73.735,13.497) 73.49,13.252 ccw(c73.735,13.497) 73.735,13.15 74.465,13.15 ccw(c74.465,13.497) 74.71,13.252 ccw(c74.465,13.497) 74.812,13.497 74.812,13.682 cw(c75.607,13.682) 75.045,14.245 75.045,14.942 cw(c76.258,14.942) 75.4,15.8 ccw(c74.676,16.524) 75.7,16.524 R26.1
RD_P: C19.1 R22.2 R25.2 | length 6.4
  Bottom Layer w0.3: R22.2 73.155,11.555 ccw(c72.593,12.118) 73.388,12.118 73.388,12.303 cw(c73.735,12.303) 73.49,12.548 cw(c73.735,12.303) 73.735,12.65 74.465,12.65 cw(c74.465,12.303) 74.71,12.548 cw(c74.465,12.303) 74.812,12.303 74.812,12.118 ccw(c75.607,12.118) 75.045,11.555 C19.1 R25.2
RDI_N: A1.6 C20.2 | length 12.3
  Bottom Layer w0.3: C20.2 77.355,14.245 cw(c76.793,13.682) 77.588,13.682 77.588,13.497 ccw(c77.935,13.497) 77.69,13.252 ccw(c77.935,13.497) 77.935,13.15 78.993,13.15 ; 79.106,13.15 ccw(c79.106,13.65) 79.606,13.65 79.606,15.575 cw(c81.59,15.575) 81.077,17.492 81.216,17.631 ccw(c80.046,18.8) 81.7,18.8 81.7,19.917 cw(c82.929,19.917) 82.06,20.787 cw(c82.346,20.5) 82.346,20.905 A1.6 ccw(c82.989,20.876) A1.6@82.948,20.876
RDI_P: A1.3 C19.2 | length 12.3
  Bottom Layer w0.3: C19.2 77.355,11.555 ccw(c76.793,12.118) 77.588,12.118 77.588,12.303 cw(c77.935,12.303) 77.69,12.548 cw(c77.935,12.303) 77.935,12.65 79.106,12.65 ccw(c79.106,13.65) 80.106,13.65 80.106,15.563 ; 80.106,15.565 cw(c81.597,15.568) 81.6,17.059 85.414,17.059 ccw(c85.414,17.181) A1.3
RX: R4.1 VT1.3 XP1.3 | length 6
  Bottom Layer w0.5: XP1.3 cw(c13,26.761) 13.819,27.581 VT1.3 15.3,25.152 ccw(c17.84,25.152) 16.044,23.356 R4.1
RX_N: DD2.5 R23.1 | length 7.4
  Bottom Layer w0.3: DD2.5 68.5,15.75 cw(c68.5,14.75) 69.5,14.75 69.5,13.65 ccw(c70,13.65) 70,13.15 70.265,13.15 ccw(c70.265,13.497) 70.51,13.252 ccw(c70.265,13.497) 70.612,13.497 70.612,13.682 cw(c71.407,13.682) 70.845,14.245 R23.1
RX_P: DD2.6 R22.1 | length 7.4
  Bottom Layer w0.3: DD2.6 68.5,15.25 cw(c68.5,14.75) 69,14.75 69,13.65 ccw(c70,13.65) 70,12.65 70.265,12.65 cw(c70.265,12.303) 70.51,12.548 cw(c70.265,12.303) 70.612,12.303 70.612,12.118 ccw(c71.407,12.118) 70.845,11.555 R22.1
SPI1-MISO: DD1.22 DD2.34 | length 24.4
  Top Layer w0.5: v1(47,14.7) v1(48.6,16.3)
  Bottom Layer w0.3: DD1.22 36.25,17.5 ccw(c38.75,17.5) 38.75,15 46.276,15 cw(c46.276,13.976) 46.642,14.932 cw(c46.276,13.976) v1(47,14.7) ; v1(48.6,16.3) cw(c49.686,15.214) 49.045,16.61 cw(c49.686,15.214) 49.686,16.75 DD2.34
SPI1-MOSI: DD1.23 DD2.35 | length 25.6
  Top Layer w0.5: v1(45.1,14.2) 47.086,16.186 47.086,16.218 v1(47.168,16.3)
  Bottom Layer w0.3: DD1.23 35.75,17.5 ccw(c38.75,17.5) 38.75,14.5 44.376,14.5 cw(c44.376,13.476) 44.742,14.432 cw(c44.376,13.476) v1(45.1,14.2) ; v1(47.168,16.3) 47.374,16.506 cw(c49.17,14.71) 48.294,17.094 cw(c49.17,14.71) 49.17,17.25 DD2.35
SPI1-SCK: DD1.21 DD2.33 | length 23
  Bottom Layer w0.3: DD1.21 36.75,17.5 ccw(c38.75,17.5) 38.75,15.5 48.47,15.5 ccw(c48.47,16.78) 49.375,15.875 ; 49.375,15.875 cw(c50.28,14.97) 50.28,16.25 DD2.33
SWCLK: DD1.49 R3.2 | length 2.5
  Bottom Layer w0.3: R3.2 31.15,29.9 cw(c31.15,29.8) DD1.49
SWDIO: DD1.46 R2.2 | length 5.8
  Top Layer w0.5: v1(27.5,26.75) v1(27.5,28.6)
  Bottom Layer w0.3: v1(27.5,26.75) DD1.46
  Bottom Layer w0.5: R2.2 26.2,29.9 cw(c26.2,28.6) v1(27.5,28.6)
TCT: A1.4 C21.1 R28.1 | length 7.2
  Bottom Layer w0.4: A1.4 85.719,18.365 cw(c85.719,17.119) 86.6,18 ccw(c87.566,18.966) 87.566,17.6 C21.1 R28.1
TD_N: A1.2 R21.2 R27.1 | length 20.4
  Top Layer w0.3: v1(80.3,18.612) cw(c79.973,18.612) 80.204,18.381 80.179,18.356 ccw(c80.471,18.065) 80.109,18.262 ccw(c80.471,18.065) 80.059,18.065 80.059,17.668 ccw(c81.43,17.668) 80.46,16.698 82.149,15.01 ccw(c83.025,15.886) 83.025,14.647 83.414,14.647 ccw(c83.414,14.947) 83.626,14.735 ccw(c83.414,14.947) 83.714,14.947 ccw(c83.414,14.947) 83.626,15.159 A1.2
  Bottom Layer w0.3: R27.1 R21.2 73.155,23.145 cw(c72.593,22.582) 73.377,22.716 73.406,22.286 ccw(c73.735,22.397) 73.479,22.163 73.501,22.141 ccw(c73.735,22.397) 73.653,22.06 77.338,22.05 cw(c77.331,19.331) 79.254,21.254 79.525,20.982 ; 79.526,20.982 cw(c78.279,19.736) 80.041,19.736 80.041,19.189 ccw(c80.483,19.189) 80.171,18.877 80.204,18.843 cw(c79.973,18.612) v1(80.3,18.612)
TD_P: A1.1 R20.2 R24.1 | length 21.1
  Top Layer w0.3: v1(79.3,18.6) ccw(c79.627,18.6) 79.396,18.369 79.429,18.335 cw(c79.117,18.023) 79.559,18.023 79.559,17.549 ccw(c81.144,17.549) 80.023,16.428 81.797,14.655 ccw(c83.025,15.886) 82.84,14.157 82.862,14.154 ccw(c83.024,15.882) 83.024,14.147 83.417,14.147 ccw(c83.417,14.94) 83.978,14.379 83.981,14.382 cw(c84.827,13.537) 84.827,14.733 85.071,14.733 cw(c85.071,14.126) A1.1
  Bottom Layer w0.3: R24.1 R20.2 73.155,20.455 ccw(c72.593,21.018) 73.388,21.018 73.388,21.203 cw(c73.735,21.203) 73.49,21.448 cw(c73.735,21.203) 73.735,21.55 77.331,21.55 cw(c77.331,19.331) 78.9,20.9 79.088,20.712 cw(c77.993,19.618) 79.541,19.618 79.541,19.147 cw(c79.129,19.147) 79.421,18.856 79.396,18.831 ccw(c79.627,18.6) 79.347,18.77 ccw(c79.627,18.6) v1(79.3,18.6)
TX: R5.1 VT2.3 XP1.1 | length 5.6
  Bottom Layer w0.5: XP1.1 13.156,33.156 cw(c14.952,31.36) 14.952,33.9 VT2.3 15.3,32.952 ccw(c17.84,32.952) 16.044,31.156 R5.1
TX_N: DD2.1 R21.1 | length 8.7
  Bottom Layer w0.3: DD2.1 67.25,17.75 ccw(c67.25,18.5) 68,18.5 68,20.45 cw(c69.6,20.45) 69.6,22.05 70.265,22.05 ccw(c70.265,22.397) 70.51,22.152 ccw(c70.265,22.397) 70.612,22.397 70.612,22.582 cw(c71.407,22.582) 70.845,23.145 R21.1
TX_P: DD2.2 R20.1 | length 8.7
  Bottom Layer w0.3: DD2.2 67.25,17.25 ccw(c67.25,18.5) 68.5,18.5 68.5,20.45 cw(c69.6,20.45) 69.6,21.55 70.265,21.55 cw(c70.265,21.203) 70.51,21.448 cw(c70.265,21.203) 70.612,21.203 70.612,21.018 ccw(c71.407,21.018) 70.845,20.455 R20.1
USART1-RX: DD1.43 R7.1 VT2.2 | length 17
  Bottom Layer w0.3: VT2.2 19.622,32.95 cw(c19.622,32.274) 20.1,32.752 ccw(c22.64,32.752) 20.844,30.956 21.756,30.044 cw(c19.719,28.006) 22.6,28.006 22.6,26.2 ccw(c23.9,26.2) 23.9,24.9 26.253,24.9 ccw(c26.253,25.497) 26.674,25.074 ; 26.675,25.075 cw(c27.097,24.653) 27.097,25.25 DD1.43
USART1-TX: DD1.42 R6.1 VT1.2 | length 11.6
  Bottom Layer w0.3: VT1.2 17.909,25.141 19.859,25.141 R6.1 22.076,24.9 cw(c22.076,23.876) 22.649,24.725 ccw(c23.433,25.508) 22.806,24.594 ccw(c23.433,25.508) 23.433,24.4 26.555,24.4 ccw(c26.555,24.997) 26.977,24.574 cw(c27.4,24.153) 27.4,24.75 DD1.42
W5500-CS: DD1.25 DD2.32 R16.1 | length 28.3
  Bottom Layer w0.3: DD1.25 34.75,15.302 ccw(c37.29,15.302) 35.494,13.506 R16.1 47.848,12.9 ccw(c47.848,15.44) 49.644,13.644 51.006,15.006 cw(c52.802,13.21) 52.802,15.75 DD2.32
W5500-INT: DD1.20 DD2.36 R17.1 | length 22.5
  Bottom Layer w0.3: DD1.20 37.25,17.5 ccw(c38.75,17.5) 38.75,16 43.348,16 ccw(c43.348,18.54) 45.144,16.744 R17.1 45.693,16.8 ccw(c45.693,18.507) 46.9,17.3 cw(c47.986,16.214) 47.986,17.75 DD2.36
W5500-RST: DD1.24 DD2.37 R18.1 | length 31.6
  Top Layer w0.5: v1(50.1,15.4) 51.664,16.964 ccw(c50.127,18.5) v1(52.3,18.5)
  Bottom Layer w0.3: DD1.24 35.25,17.5 ccw(c39.35,17.5) 39.35,13.4 47.048,13.4 ccw(c47.048,15.94) 48.844,14.144 v1(50.1,15.4) ; R18.1 51.105,18.995 ccw(c52.3,20.19) v1(52.3,18.5) 52.55,18.25 57.758,18.25 ccw(c57.758,19.318) 58.513,18.563 DD2.37
XI: BQ2.1 C11.2 DD2.30 R15.2 | length 24
  Bottom Layer w0.3: R15.2 41.608,6.4 cw(c41.608,3.86) 43.404,5.656 BQ2.1 44.546,5.606 cw(c46.342,3.81) 45.156,6.056 cw(c46.342,3.81) 46.342,6.35 C11.2 49.956,8.206 ccw(c48.401,9.761) 50.6,9.761 50.6,11.406 cw(c53.481,11.406) 51.444,13.444 52.006,14.006 cw(c53.802,12.21) 53.04,14.633 cw(c53.802,12.21) 53.802,14.75 DD2.30
XO: BQ2.2 C12.2 DD2.31 R15.1 | length 22.9
  Bottom Layer w0.3: R15.1 41.608,8.6 ccw(c41.608,11.14) 43.404,9.344 BQ2.2 44.546,9.394 ccw(c46.342,11.19) 45.156,8.944 ccw(c46.342,11.19) 46.342,8.65 C12.2 48.176,8.65 ccw(c48.176,10.374) 49.9,10.374 49.9,11.848 cw(c52.44,11.848) 49.98,12.479 cw(c52.44,11.848) 50.644,13.644 51.506,14.506 cw(c53.302,12.71) 53.302,15.25 55.5,15.25 56.975,15.25 57.05,15.25 DD2.31
pads on no net: A1.0@91.85,13.285 A1.0@91.85,24.715 A1.7 DD1.2 DD1.3 DD1.4 DD1.8 DD1.9 DD1.10 DD1.11 DD1.14 DD1.15 DD1.16 DD1.17 DD1.26 DD1.27 DD1.29 DD1.30 DD1.33 DD1.34 DD1.35 DD1.36 DD1.37 DD1.38 DD1.39 DD1.40 DD1.41 DD1.44 DD1.45 DD1.50 DD1.51 DD1.52 DD1.53 DD1.54 DD1.55 DD1.56 DD1.57 DD1.58 DD1.59 DD2.7 DD2.12 DD2.13 DD2.18 DD2.23 DD2.24 DD2.26 DD2.38 DD2.39 DD2.40 DD2.41 DD2.42 DD2.46 DD2.47 XP1.5 XP1.7 XP2.1

## Polygon pours and split planes (outlines as drawn)
3.3V on Bottom Layer "3.3V_L02_P001" (solid, remove dead copper, pour order 1): 34,17 34,15.6 34,13.5 36.5,13.5 36.5,7.3 19.5,7.3 19.5,9.55 21,9.55 21,16 19,16 19,24 24.5,24 24.5,14 27,14 27,17
GNDA on Bottom Layer "GNDA_L02_P006" (solid, remove dead copper, pour order 6): 90,10 98,10 98,28 90,28 90,35.5 70,35.5 69.976,28 63.476,21.5 63.476,16.892 54.77,8 53,8 53,2 90,2
GND on Bottom Layer "GND_L02_P004" (solid, remove dead copper, pour order 4): 52.5,10 56.049,10 63,17.031 63,21.7 69.5,28.2 69.5,35.5 2,35.5 2,2 12.5,2 12.5,25 25,25 25,15 26.5,15 26.5,17.5 37.056,17.5 37.056,6.3 52.5,6.3
GND on Bottom Layer "GND_L02_P002" (solid, remove dead copper, pour order 2): 40,6.7 40,9 52.5,9 52.5,2 9,2 9,8.5 15,8.5 15,6.7
5V on Bottom Layer "5V_L02_P000" (solid, remove dead copper, pour order 0): 18.5,13.5 18.5,24.5 17,24.5 17,21.5 13,21.5 13,9 20,9 20,13.5
GNDA on Top Layer "GNDA_L01_P008" (solid, remove dead copper, pour order 8): 90,10 98,10 98,28 90,28 90,35.5 70,35.5 69.976,28 63.476,21.5 63.476,16.889 56.242,9.5 53,9.5 53,2 90,2
GND on Top Layer "GND_L01_P003" (solid, remove dead copper, pour order 3): 69.5,35.5 2,35.5 2,2 52.5,2 52.5,10 56,10 63,17 63,21.7 69.5,28.2

## Keep-outs
Top Layer:
  circle w0.3: c5,5 r5
  circle w0.3: c5,33 r5
Bottom Layer:
  circle w0.1: c11,2 r1.5
  circle w0.1: c2,27 r1.5
  circle w0.3: c5,5 r5
  circle w0.3: c5,33 r5
  lines w0.1: 90,34.5 cw(c90,36) 90.094,37.497 ; 96.5,10 cw(c98,10) 99.497,9.906

## Silkscreen, mask and mechanical layers (free items; w line width, h text height)
Top Overlay:
  drawing of 10 lines, arcs and shapes, not listed
  text "+3.3V" at 48,33.1 h2.5
  text "TX" at 67,33.1 h2.5
  text "SWD" at 32.3,33 h2.5
  text "RX" at 67,29.1 h2.5
  text "ЗАВ. №:" at 31.4,25.2 h2.5
  text "+5V" at 0.2,19.6 h2.5
  text "ПЛАТА UART-ETHERNET" at 15,12.5 h2.5
  text "АСТА.758723.039 V1" at 74,10.9 h2.5 r90
  text "ETHERNET" at 74.7,7.1 h2.5
Bottom Overlay:
  text "UART" at 8.7,23.7 h2.5 r270
Bottom Courtyard:
  the board outline again, w0.1
Top Assembly (Mech13):
  circle w0.1: c95,33 r1.7
  circle w0.1: c5,5 r1.7
  circle w0.1: c5,33 r1.7
  circle w0.1: c95,5 r1.7
  lines w0.1: 2.5,5 7.5,5 ; 2.5,33 7.5,33 ; 5,2.5 5,7.5 ; 5,30.5 5,35.5 ; 92.5,5 97.5,5 ; 92.5,33 97.5,33 ; 95,2.5 95,7.5 ; 95,30.5 95,35.5 ; 0,0 0,38 100,38 100,0 0,0
Bottom Assembly (Mech14):
  circle w0.1: c95,33 r1.7
  circle w0.1: c5,5 r1.7
  circle w0.1: c5,33 r1.7
  circle w0.1: c95,5 r1.7
  lines w0.1: 2.5,5 7.5,5 ; 2.5,33 7.5,33 ; 5,2.5 5,7.5 ; 5,30.5 5,35.5 ; 92.5,5 97.5,5 ; 92.5,33 97.5,33 ; 95,2.5 95,7.5 ; 95,30.5 95,35.5 ; 0,0 0,38 100,38 100,0 0,0